# Altium PCB EV306V1.1.PcbDoc (part 2 of 2)
Units mil, origin at the board's own origin, x right, y up, seen from the top; angles counter-clockwise.
Board outline 2423.31 x 1575 mil, 2 copper layers (Top Layer, Bottom Layer); 70 components, 60 nets, 272 pads, 204 vias.
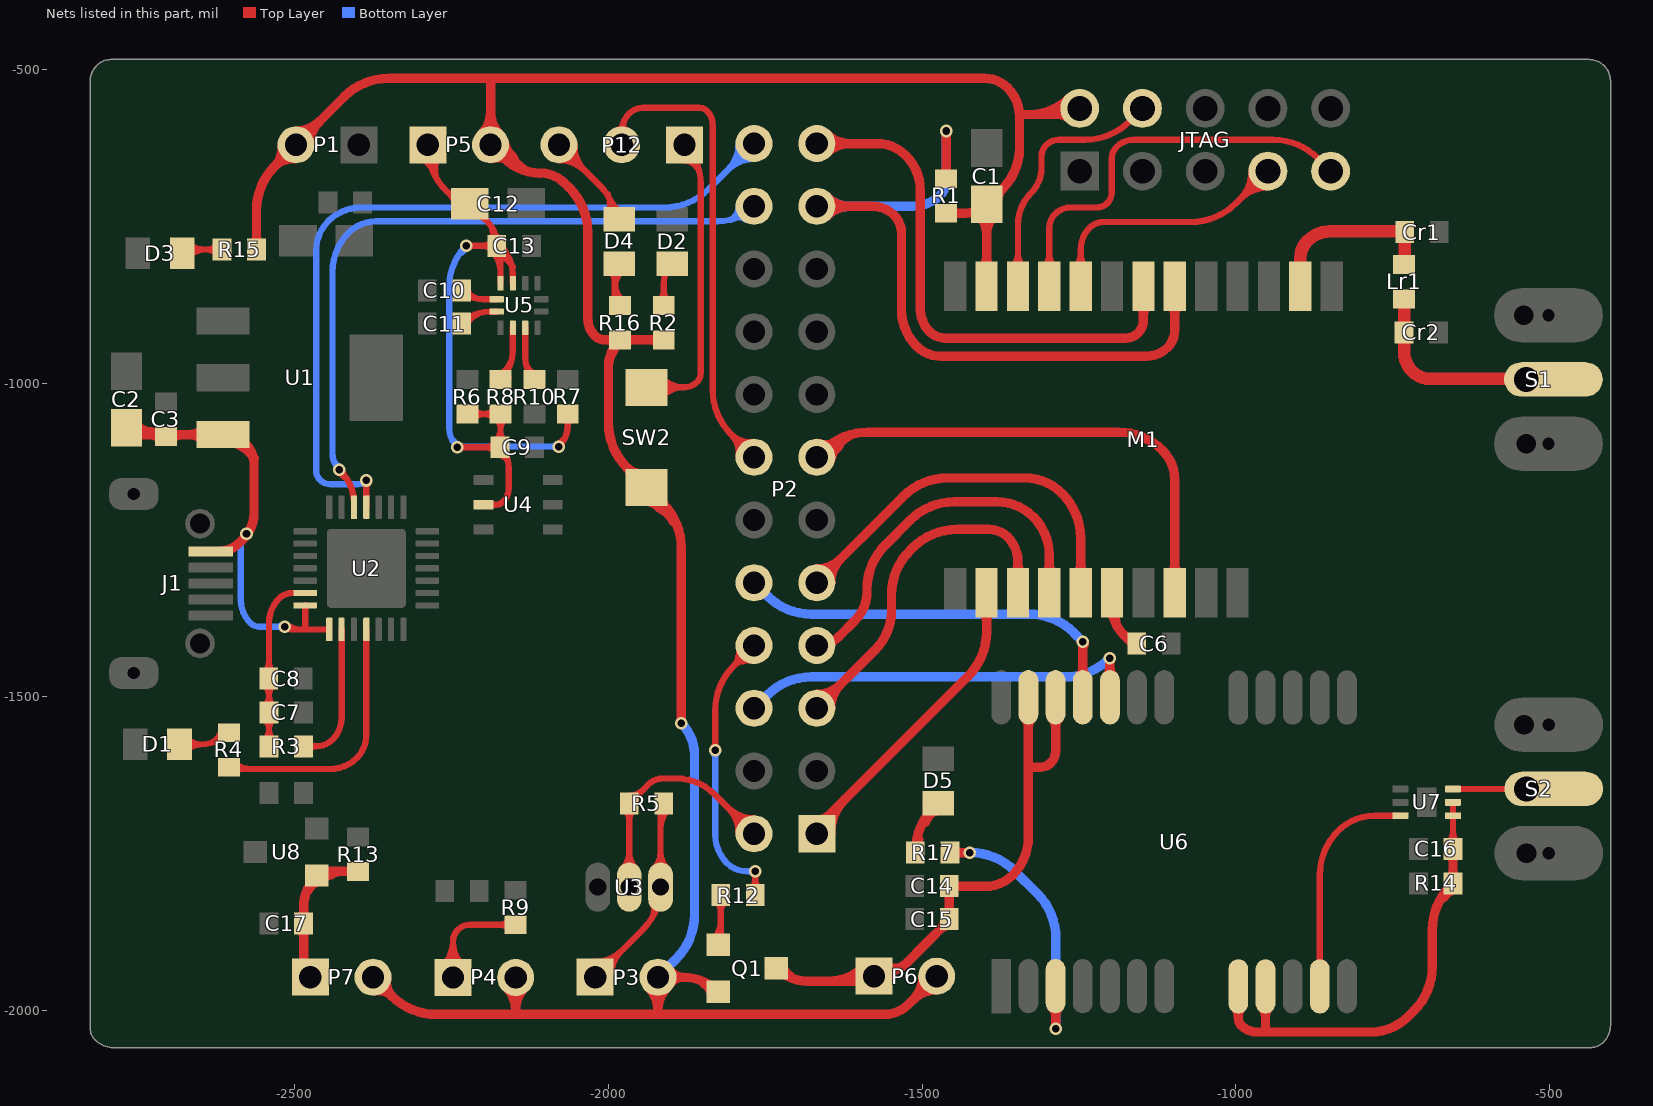
[diagram p2: the nets of this part, all layers, seen from the top]

## Via types
v1: diameter 20, hole 12, Top Layer to Bottom Layer, tented both sides, 191 vias
v2: diameter 19.68, hole 7.87, Top Layer to Bottom Layer, tented both sides, 9 vias
v3: diameter 129.92, hole 129.92, Top Layer to Bottom Layer, tented both sides, 4 vias

## Nets (pads, with @x,y where several pads share a name; then routed paths per layer and width w, separated by ;. In a path a pad name is that pad's centre, name@x,y a point inside that pad or via, vN(x,y) a via of type N, cw(c..) or ccw(c..) an arc to the next point about the centre after c; other vN are vias at no path point) (continued)
NetC6_2: C6.2 M1.6 | length 217.4
  Top Layer w15: M1.6@-1198,-1335.07 cw(c-1196.17,-1335.07) M1.6@-1197.46,-1333.78 -1197.46,-1356.42 ccw(c-1134.42,-1356.42) -1179,-1401 ; C6.2@-1158,-1415 cw(c-1158,-1398.1) -1169.94,-1410.06 -1179,-1401 ; -1179,-1401 ccw(c-1166.14,-1388.14) -1160.38,-1405.39 cw(c-1166.14,-1388.14) -1179,-1401 ; M1.6@-1202.57,-1364.28 cw(c-1214.47,-1384.88) -1191.49,-1378.73 ccw(c-1214.47,-1384.88) M1.6@-1202.57,-1364.28 ; -1191.17,-1379.92 cw(c-1166.5,-1373.31) -1188.62,-1360.54 ccw(c-1166.5,-1373.31) -1191.17,-1379.92
NetC7_1: C7.1 C8.1 R3.2 U2.6 | length 663.2
  Top Layer w10: R3.2@-2541.31,-1578.69 -2541,-1578.39 -2541,-1381.63 cw(c-2486.37,-1381.63) -2525,-1343 cw(c-2504.17,-1363.83) -2504.17,-1334.37 U2.6@-2483.44,-1334.37 ; C8.1@-2548.5,-1480.26 cw(c-2566.59,-1498.36) -2541,-1498.36 ccw(c-2566.59,-1498.36) C8.1@-2548.5,-1480.26 ; C8.1@-2548.5,-1461.12 ccw(c-2566.59,-1443.02) -2541,-1443.02 cw(c-2566.59,-1443.02) C8.1@-2548.5,-1461.12 ; R3.2@-2548.38,-1569.12 ccw(c-2566.19,-1551.31) -2541,-1551.31 cw(c-2566.19,-1551.31) R3.2@-2548.38,-1569.12 ; C7.1@-2548.38,-1534.26 cw(c-2566.19,-1552.08) -2541,-1552.08 ccw(c-2566.19,-1552.08) C7.1@-2548.38,-1534.26 ; C7.1@-2548.38,-1515.12 ccw(c-2566.19,-1497.31) -2541,-1497.31 cw(c-2566.19,-1497.31) C7.1@-2548.38,-1515.12 ; -2541,-1552.79 ccw(c-2517.91,-1552.79) -2534.24,-1569.12 cw(c-2517.91,-1552.79) -2541,-1552.79 ; -2541,-1550.59 cw(c-2517.91,-1550.59) -2534.24,-1534.26 ccw(c-2517.91,-1550.59) -2541,-1550.59 ; -2541,-1498.79 ccw(c-2517.91,-1498.79) -2534.24,-1515.12 cw(c-2517.91,-1498.79) -2541,-1498.79 ; -2541,-1496.31 cw(c-2518.31,-1496.31) -2534.35,-1480.26 ccw(c-2518.31,-1496.31) -2541,-1496.31 ; -2541,-1445.08 ccw(c-2518.31,-1445.08) -2534.35,-1461.12 cw(c-2518.31,-1445.08) -2541,-1445.08
NetC10_1: C10.1 U5.11 | length 119.7
  Top Layer w10: C10.1@-2234,-852 ccw(c-2199.79,-817.79) -2199.79,-866.17 U5.11@-2178.03,-866.17 ; C10.1@-2229.51,-863.43 cw(c-2221.88,-878.6) -2213.39,-863.9 ccw(c-2221.88,-878.6) C10.1@-2229.51,-863.43 ; C10.1@-2224.34,-851.91 ccw(c-2208.16,-847.58) -2216.54,-862.08 cw(c-2208.16,-847.58) C10.1@-2224.34,-851.91
NetC11_2: C11.2 U5.12 | length 100
  Top Layer w10: C11.2@-2235,-905 cw(c-2188.79,-951.21) -2188.79,-885.86 U5.12@-2178.03,-885.86 ; C11.2@-2231.41,-892.84 ccw(c-2223.69,-864.03) -2208.78,-889.86 ; C11.2@-2224.34,-905.09 cw(c-2206.51,-909.87) -2215.74,-893.88
NetC16_2: C16.2 R14.1 U6.8 U6.9 U7.1 U7.2 | length 1047.4
  Top Layer w10: U7.2@-654.07,-1668 U7.1@-654.07,-1689.26 -654.07,-1741.93 C16.2@-654,-1742 ; C16.2@-661.07,-1732.43 ccw(c-677.97,-1715.53) -654.07,-1715.53 cw(c-677.97,-1715.53) C16.2@-661.07,-1732.43 ; -654.07,-1715.19 ccw(c-629.69,-1715.19) -646.93,-1732.43 cw(c-629.69,-1715.19) -654.07,-1715.19
  Top Layer w15: U6.8@-1002.03,-1994.69 cw(c-1016.12,-2008.77) -996.2,-2008.77 cw(c-976.28,-2008.77) U6.8@-990.37,-1994.69 ; U6.8@-996.2,-1961.3 -996.2,-2011.45 ccw(c-978.45,-2011.45) -991,-2024 ccw(c-966.86,-1999.86) -966.86,-2034 -953,-2034 ; U6.9@-958.73,-1994.69 cw(c-972.82,-2008.77) -952.9,-2008.77 cw(c-932.98,-2008.77) U6.9@-947.07,-1994.69 ; U6.9@-952.9,-1961.3 -952.9,-2033.9 -953,-2034 ; -668.46,-1819.33 cw(c-645.07,-1832.84) R14.1@-652.06,-1806.74 ; C16.2@-654,-1742 R14.1@-654,-1797 -657.71,-1800.71 ccw(c-587,-1871.42) -687,-1871.42 -687,-1929.58 cw(c-787,-1929.58) -716.29,-2000.29 -725,-2009 cw(c-785.36,-1948.64) -785.36,-2034 -953,-2034 ; -654,-1776.39 cw(c-672.11,-1776.39) -659.3,-1789.2 ccw(c-672.11,-1776.39) -654,-1776.39 ; -654,-1776.39 ccw(c-635.89,-1776.39) -648.7,-1789.2 cw(c-635.89,-1776.39) -654,-1776.39 ; -654,-1762.61 cw(c-635.89,-1762.61) -648.7,-1749.8 ccw(c-635.89,-1762.61) -654,-1762.61 ; -654,-1762.61 ccw(c-672.11,-1762.61) -659.3,-1749.8 cw(c-672.11,-1762.61) -654,-1762.61
NetCr1_2: Cr1.2 Lr1.1 M1.12 | length 345.7
  Top Layer w20: M1.12@-897.46,-845.59 -897.46,-800.68 cw(c-858.32,-800.68) -886,-773 cw(c-849.79,-809.21) -849.79,-758 -733.41,-758 cw(c-733.41,-761.41) Cr1.2@-731,-759 -731,-808.59 cw(c-734.41,-808.59) Lr1.1@-732,-811 ; -897.46,-805.31 cw(c-916.09,-805.31) -902.92,-818.48 ccw(c-916.09,-805.31) -897.46,-805.31 ; -897.46,-805.31 ccw(c-878.84,-805.31) -892.01,-818.48 cw(c-878.84,-805.31) -897.46,-805.31
NetCr2_2: Cr2.2 Lr1.2 S1.1 | length 346.9
  Top Layer w20: Lr1.2@-732,-866 Cr2.2@-732,-919 -732,-949.62 ccw(c-687.62,-949.62) -719,-981 ccw(c-690.03,-952.03) -690.03,-993 -537.31,-993 ccw(c-534.89,-990.59) -534.89,-994 S1.1@-494,-994
NetD1_1: D1.1 R4.2 | length 224.2
  Top Layer w10: D1.1@-2683.62,-1575.63 -2649.98,-1575.63 ; -2630.4,-1571.66 ccw(c-2644.6,-1547.06) R4.2@-2617.16,-1554.41 ; -2625.17,-1568.64 cw(c-2615.23,-1585.86) R4.2@-2610.09,-1566.66 ; R4.2@-2605,-1557 cw(c-2649.98,-1512.02) -2649.98,-1575.63 ; -2649.98,-1575.63 cw(c-2649.98,-1544.43) -2672.85,-1565.64 ccw(c-2649.98,-1544.43) -2649.98,-1575.63 ; -2649.98,-1575.63 ccw(c-2649.98,-1606.83) -2672.85,-1585.61 cw(c-2649.98,-1606.83) -2649.98,-1575.63
NetD2_1: D2.1 R2.1 | length 159.3
  Top Layer w10: R2.1@-1912,-876 -1912,-841.66 cw(c-1866.35,-841.66) D2.1@-1898.63,-809.38 D2.1@-1889.29,-818.72 ; -1912,-851.86 cw(c-1936.14,-851.86) -1919.07,-868.93 ccw(c-1936.14,-851.86) -1912,-851.86 ; -1912,-851.86 ccw(c-1887.86,-851.86) -1904.93,-868.93 cw(c-1887.86,-851.86) -1912,-851.86
NetD3_1: D3.1 R15.1 | length 252.3
  Top Layer w10: D3.1@-2679.62,-792.63 cw(c-2666.03,-806.22) -2666.03,-787 R15.1@-2616,-787 ; -2640.14,-787 cw(c-2640.14,-811.14) -2623.07,-794.07 ccw(c-2640.14,-811.14) -2640.14,-787 ; -2640.14,-787 ccw(c-2640.14,-762.86) -2623.07,-779.93 cw(c-2640.14,-762.86) -2640.14,-787 ; D3.1@-2669.24,-797.7 cw(c-2643.41,-823.53) -2643.41,-787 ccw(c-2643.41,-823.53) D3.1@-2669.24,-797.7 ; D3.1@-2669.24,-776.93 ccw(c-2644.93,-752.62) -2644.93,-787 cw(c-2644.93,-752.62) D3.1@-2669.24,-776.93
NetD4_1: D4.1 R16.1 | length 247
  Top Layer w10: D4.1@-1990.63,-809.38 -1992.71,-811.46 cw(c-1999.25,-818) -1990,-818 R16.1@-1990,-876 ; D4.1@-1998.33,-819.76 cw(c-2018.44,-839.87) -1990,-839.87 ccw(c-2018.44,-839.87) D4.1@-1998.33,-819.76 ; -1990,-849.79 cw(c-1947.53,-849.79) -1977.56,-819.76 ccw(c-1947.53,-849.79) -1990,-849.79 ; -1990,-838.58 ccw(c-1947.08,-838.58) -1977.43,-868.93 cw(c-1947.08,-838.58) -1990,-838.58
NetD4_2: D4.2 P12.3 | length 411.5
  Top Layer w10: P12.3@-2079,-644.53 cw(c-2079,-703.74) -2037.13,-661.87 cw(c-1995.26,-620) P12.3@-2054.47,-620 ; P12.3@-2079,-634.53 cw(c-2079,-669.6) -2054.2,-644.8 cw(c-2029.4,-620) P12.3@-2064.47,-620 ; P12.3@-2079,-620 -2011.94,-687.06 cw(c-2063.4,-738.51) D4.2@-1990.63,-738.51 ; -2001.25,-698.89 ccw(c-1958.45,-687.42) -1980.6,-725.79 cw(c-1958.45,-687.42) -2001.25,-698.89 ; D4.2@-2000.66,-731.17 ccw(c-2023.7,-717.87) -1998.01,-710.99 cw(c-2023.7,-717.87) D4.2@-2000.66,-731.17
NetD5_1: D5.1 R17.1 | length 192.5
  Top Layer w15: R17.1@-1511,-1748 -1511,-1747.17 cw(c-1411,-1747.17) -1481.71,-1676.46 D5.1@-1474.63,-1669.38 ; -1495.34,-1700.06 ccw(c-1526.76,-1681.92) D5.1@-1491.71,-1672.53 ; -1490.48,-1691.65 cw(c-1470.95,-1702.93) D5.1@-1476.79,-1681.15 ; R17.1@-1514.75,-1739 ccw(c-1524.54,-1722.05) -1505.63,-1727.11 cw(c-1524.54,-1722.05) R17.1@-1514.75,-1739 ; -1506.17,-1729.13 ccw(c-1490.1,-1733.43) -1504.5,-1741.75 cw(c-1490.1,-1733.43) -1506.17,-1729.13
NetP12_1: P12.1 SW2.1 | length 693.6
  Top Layer w10: SW2.1@-1939.18,-1006.48 -1879.47,-1006.48 ccw(c-1879.47,-977.53) -1859,-998 ccw(c-1873.49,-983.51) -1853,-983.51 -1853,-682.77 ccw(c-1941.77,-682.77) P12.1@-1879,-620 P12.1@-1858.29,-640.71 ; SW2.1@-1924.54,-1016.3 cw(c-1902.21,-1036.77) -1902.21,-1006.48 cw(c-1902.21,-976.19) SW2.1@-1924.54,-996.66 ; SW2.1@-1917.17,-1023.06 cw(c-1879.48,-1057.62) -1879.48,-1006.48 cw(c-1879.48,-955.34) SW2.1@-1917.17,-989.9 ; P12.1@-1880.63,-644.47 cw(c-1882.68,-675.18) -1856.03,-659.79 cw(c-1829.37,-644.41) P12.1@-1856.99,-630.82
NetQ1_1: Q1.1 R12.1 | length 252.5
  Top Layer w10: Q1.1@-1824.96,-1895.11 ccw(c-1834.51,-1885.55) -1821,-1885.55 R12.1@-1821,-1816 ; -1821,-1842.64 cw(c-1796.86,-1842.64) -1813.93,-1825.57 ccw(c-1796.86,-1842.64) -1821,-1842.64 ; -1821,-1842.64 ccw(c-1845.14,-1842.64) -1828.07,-1825.57 cw(c-1845.14,-1842.64) -1821,-1842.64 ; Q1.1@-1832.96,-1886.11 ccw(c-1861.85,-1857.23) -1821,-1857.23 cw(c-1861.85,-1857.23) Q1.1@-1832.96,-1886.11 ; -1821,-1871.58 ccw(c-1800.45,-1871.58) -1814.98,-1886.11 cw(c-1800.45,-1871.58) -1821,-1871.58
NetR3_1: R3.1 U2.9 | length 286.7
  Top Layer w10: R3.1@-2486.31,-1578.69 -2465.81,-1578.69 ; U2.9@-2425.37,-1392.44 -2425.37,-1532.68 cw(c-2475.32,-1532.68) -2440,-1568 cw(c-2465.81,-1542.19) -2465.81,-1578.69 ; -2465.82,-1578.69 cw(c-2465.82,-1562.7) -2478.42,-1572.54 ccw(c-2465.82,-1562.7) -2465.82,-1578.69 ; -2465.82,-1578.69 ccw(c-2465.82,-1594.69) -2478.42,-1584.85 cw(c-2465.82,-1594.69) -2465.82,-1578.69
NetR4_1: R4.1 U2.11 | length 494
  Top Layer w10: R4.1@-2605,-1612 ccw(c-2597.76,-1604.76) -2597.76,-1615 -2444.46,-1615 ccw(c-2444.46,-1553.54) -2401,-1597 ccw(c-2437.21,-1560.79) -2386,-1560.79 U2.11@-2386,-1392.44 ; R4.1@-2595.43,-1619.07 cw(c-2585.6,-1628.9) -2585.6,-1615 ccw(c-2585.6,-1628.9) R4.1@-2595.43,-1619.07 ; R4.1@-2595.43,-1604.93 ccw(c-2571.12,-1580.62) -2571.12,-1615 cw(c-2571.12,-1580.62) R4.1@-2595.43,-1604.93
NetR8_1: R8.1 U5.2 | length 125.7
  Top Layer w10: R8.1@-2172.09,-984.34 ccw(c-2176.42,-968.16) -2161.92,-976.54 ; R8.1@-2172,-994 ccw(c-2219.22,-946.78) -2152.44,-946.78 U5.2@-2152.44,-911.45 ; R8.1@-2159.84,-991.41 cw(c-2129.38,-983.25) -2156.69,-967.48
NetR10_1: R10.1 U5.3 | length 148.9
  Top Layer w10: U5.3@-2132.76,-911.45 -2132.76,-958.37 ccw(c-2082.37,-958.37) R10.1@-2118,-994 ; -2130.41,-972.5 cw(c-2146.81,-981.96) -2129.59,-989.84 ccw(c-2146.81,-981.96) -2130.41,-972.5 ; -2128.08,-976.54 ccw(c-2113.58,-968.16) -2117.91,-984.34 cw(c-2113.58,-968.16) -2128.08,-976.54
NetR17_2: R17.2 U6.3 | length 542.1
  Top Layer w15: R17.2@-1456,-1748 v1(-1424,-1748) ; U6.3@-1293.33,-1994.29 cw(c-1308.62,-2009.58) -1287,-2009.58 ; U6.3@-1287.5,-1960.9 cw(c-1288.71,-1962.11) -1287,-1962.11 v1(-1287,-2029) ; -1287,-2007.17 cw(c-1268.79,-2007.17) U6.3@-1281.67,-1994.29 ; -1437.89,-1748 cw(c-1437.89,-1729.89) -1450.7,-1742.7 ccw(c-1437.89,-1729.89) -1437.89,-1748 ; -1437.89,-1748 ccw(c-1437.89,-1766.11) -1450.7,-1753.3 cw(c-1437.89,-1766.11) -1437.89,-1748
  Bottom Layer w15: v1(-1424,-1748) -1423.42,-1748 cw(c-1423.42,-1848) -1352.71,-1777.29 -1316.29,-1813.71 cw(c-1387,-1884.42) -1287,-1884.42 v1(-1287,-2029)
NetS2_1: S2.1 U7.3 | length 160.5
  Top Layer w10: U7.3@-654.07,-1646.74 -493.7,-1646.74 S2.1@-493.58,-1646.62
NetU6_11: U6.11 U7.6 | length 361.2
  Top Layer w10: U6.11@-866.3,-1961.3 -866.3,-1784.15 cw(c-766.3,-1784.15) -837.01,-1713.44 cw(c-778.64,-1771.81) -825.14,-1703.6 cw(c-778.64,-1771.81) -778.64,-1689.26 U7.6@-737.93,-1689.26
PWR_CNTR1: M1.4 P2.7 | length 679.9
  Top Layer w15: P2.7@-1668,-1418 ccw(c-1668,-1367.3) -1632.15,-1403.15 -1607.09,-1378.09 ccw(c-1653.18,-1332) -1588,-1332 -1588,-1328.42 cw(c-1488,-1328.42) -1558.71,-1257.71 -1519.29,-1218.29 cw(c-1448.58,-1289) -1448.58,-1189 -1380.94,-1189 cw(c-1380.94,-1270.94) -1323,-1213 cw(c-1384.65,-1274.65) -1297.46,-1274.65 M1.4@-1297.46,-1333.78 ; -1297.46,-1287.46 cw(c-1322.13,-1287.46) -1304.69,-1304.9 ccw(c-1322.13,-1287.46) -1297.46,-1287.46 ; -1297.46,-1287.46 ccw(c-1272.8,-1287.46) -1290.24,-1304.9 cw(c-1272.8,-1287.46) -1297.46,-1287.46
PWR_CNTR2: P2.8 R12.2 | length 883.5
  Top Layer w10: v1(-1830,-1585) -1830,-1521.42 cw(c-1730,-1521.42) -1800.71,-1450.71 ; -1793.06,-1436.08 cw(c-1749.64,-1439.22) P2.8@-1778.12,-1406.3 ; -1786.08,-1443.06 ccw(c-1789.22,-1399.64) P2.8@-1756.3,-1428.12 ; R12.2@-1768,-1811.17 ccw(c-1761.17,-1811.17) R12.2@-1766,-1816 v1(-1766,-1778) ; P2.8@-1768,-1418 -1800.71,-1450.71 ; -1830,-1572.93 cw(c-1842.07,-1572.93) -1833.54,-1581.46 ccw(c-1842.07,-1572.93) -1830,-1572.93 ; -1830,-1572.93 ccw(c-1817.93,-1572.93) -1826.46,-1581.46 cw(c-1817.93,-1572.93) -1830,-1572.93 ; -1800.71,-1450.71 cw(c-1778.54,-1472.88) -1772.62,-1442.09 ccw(c-1778.54,-1472.88) -1800.71,-1450.71 ; -1800.71,-1450.71 ccw(c-1822.88,-1428.54) -1792.09,-1422.62 cw(c-1822.88,-1428.54) -1800.71,-1450.71 ; -1766,-1790.07 cw(c-1753.93,-1790.07) -1762.46,-1781.54 ccw(c-1753.93,-1790.07) -1766,-1790.07 ; -1766,-1790.07 ccw(c-1778.07,-1790.07) -1769.54,-1781.54 cw(c-1778.07,-1790.07) -1766,-1790.07 ; -1766,-1789.36 cw(c-1790.14,-1789.36) -1773.07,-1806.43 ccw(c-1790.14,-1789.36) -1766,-1789.36 ; -1766,-1789.36 ccw(c-1741.86,-1789.36) -1758.93,-1806.43 cw(c-1741.86,-1789.36) -1766,-1789.36
  Bottom Layer w10: v1(-1830,-1585) -1830,-1719.13 ccw(c-1765.13,-1719.13) -1811,-1765 ccw(c-1779.62,-1733.62) -1779.62,-1778 v1(-1766,-1778) ; -1830,-1597.07 cw(c-1817.93,-1597.07) -1826.46,-1588.54 ccw(c-1817.93,-1597.07) -1830,-1597.07 ; -1830,-1597.07 ccw(c-1842.07,-1597.07) -1833.54,-1588.54 cw(c-1842.07,-1597.07) -1830,-1597.07 ; -1778.07,-1778 cw(c-1778.07,-1790.07) -1769.54,-1781.54 ccw(c-1778.07,-1790.07) -1778.07,-1778 ; -1778.07,-1778 ccw(c-1778.07,-1765.93) -1769.54,-1774.46 cw(c-1778.07,-1765.93) -1778.07,-1778
RESET1: JTAG.4 M1.21 | length 505.7
  Top Layer w10: M1.21@-1347.46,-845.59 -1347.46,-747.82 cw(c-1274.18,-747.82) -1326,-696 ccw(c-1364.63,-657.37) -1310,-657.37 -1310,-639.31 cw(c-1282.69,-639.31) -1302,-620 cw(c-1282.69,-639.31) -1282.69,-612 -1240.42,-612 ccw(c-1240.42,-512) -1169.71,-582.71 JTAG.4@-1149,-562 ; -1347.46,-793.24 cw(c-1378.16,-793.24) -1356.46,-814.95 ccw(c-1378.16,-793.24) -1347.46,-793.24 ; -1347.46,-793.24 ccw(c-1316.76,-793.24) -1338.47,-814.95 cw(c-1316.76,-793.24) -1347.46,-793.24
SWCLK1: JTAG.9 M1.20 | length 756.5
  Top Layer w10: M1.20@-1297.46,-845.59 -1297.46,-752.85 cw(c-1265.15,-752.85) -1288,-730 cw(c-1263.86,-754.14) -1263.86,-720 -1221.9,-720 ccw(c-1221.9,-696.1) -1205,-713 ccw(c-1221.9,-696.1) -1198,-696.1 -1198,-642.31 cw(c-1170.69,-642.31) -1190,-623 cw(c-1163.44,-649.56) -1163.44,-612 -940.42,-612 cw(c-940.42,-712) -869.71,-641.29 JTAG.9@-849,-662 ; -1297.46,-793.24 cw(c-1328.16,-793.24) -1306.46,-814.95 ccw(c-1328.16,-793.24) -1297.46,-793.24 ; -1297.46,-793.24 ccw(c-1266.76,-793.24) -1288.47,-814.95 cw(c-1266.76,-793.24) -1297.46,-793.24
SWDIO1: JTAG.7 M1.19 | length 668.8
  Top Layer w10: M1.19@-1247.46,-845.59 -1247.46,-786.92 cw(c-1198.08,-786.92) -1233,-752 cw(c-1211.27,-773.73) -1211.27,-743 -1071.42,-743 ccw(c-1071.42,-643) -1000.71,-713.71 JTAG.7@-949,-662 ; JTAG.7@-975,-662 cw(c-1037.77,-662) -993.38,-706.38 cw(c-949,-750.77) JTAG.7@-949,-688 ; JTAG.7@-965,-662 cw(c-1003.63,-662) -976.31,-689.31 cw(c-949,-716.63) JTAG.7@-949,-678 ; -1247.46,-793.24 cw(c-1278.16,-793.24) -1256.46,-814.95 ccw(c-1278.16,-793.24) -1247.46,-793.24 ; -1247.46,-793.24 ccw(c-1216.76,-793.24) -1238.47,-814.95 cw(c-1216.76,-793.24) -1247.46,-793.24
UART1_RX1: M1.16 P2.21 R1.1 | length 1537.5
  Top Layer w15: P2.21@-1668,-718 -1578.8,-718 cw(c-1578.8,-765.8) -1545,-732 cw(c-1573.97,-760.97) -1533,-760.97 -1533,-883.06 ccw(c-1451.06,-883.06) -1509,-941 ccw(c-1470.37,-902.37) -1470.37,-957 -1142.8,-957 ccw(c-1142.8,-909.2) -1109,-943 ccw(c-1136.85,-915.15) -1097.46,-915.15 M1.16@-1097.46,-845.59 ; P2.21@-1652.42,-733.58 cw(c-1614.82,-771.18) -1614.82,-718 cw(c-1614.82,-664.82) P2.21@-1652.42,-702.42 ; R1.1@-1462,-674 v1(-1462,-598) ; -1462,-655.89 cw(c-1480.11,-655.89) -1467.3,-668.7 ccw(c-1480.11,-655.89) -1462,-655.89 ; -1462,-655.89 ccw(c-1443.89,-655.89) -1456.7,-668.7 cw(c-1443.89,-655.89) -1462,-655.89 ; -1097.46,-891.91 cw(c-1072.8,-891.91) -1090.24,-874.47 ccw(c-1072.8,-891.91) -1097.46,-891.91 ; -1097.46,-891.91 ccw(c-1122.13,-891.91) -1104.69,-874.47 cw(c-1122.13,-891.91) -1097.46,-891.91
  Bottom Layer w15: P2.21@-1668,-718 -1514.46,-718 ccw(c-1514.46,-656.54) -1471,-700 ccw(c-1492.73,-678.27) -1462,-678.27 v1(-1462,-598) ; P2.21@-1652.42,-733.58 cw(c-1614.82,-771.18) -1614.82,-718 cw(c-1614.82,-664.82) P2.21@-1652.42,-702.42
UART1_RX2: P2.22 U2.26 | length 1280.2
  Top Layer w10: v1(-2429,-1138) -2427,-1140 cw(c-2478.46,-1191.46) -2405.68,-1191.46 U2.26@-2405.68,-1197.56 ; v1@-2424.31,-1139.75 ccw(c-2417.95,-1142.12) -2421.35,-1147.99 ; v1@-2430.29,-1142.83 cw(c-2434.07,-1156.9) -2421.45,-1149.62 ccw(c-2434.07,-1156.9) v1@-2430.29,-1142.83 ; v1@-2424.17,-1139.29 ccw(c-2414.92,-1141.77) -2423.21,-1146.56 cw(c-2414.92,-1141.77) v1@-2424.17,-1139.29
  Bottom Layer w10: v1@-2433.83,-1136.71 ccw(c-2445.49,-1133.58) -2435.04,-1127.55 ccw(c-2424.58,-1121.51) v1@-2427.71,-1133.17 ; v1(-2429,-1138) cw(c-2402.44,-1111.44) -2440,-1111.44 -2440,-822.77 cw(c-2351.23,-822.77) -2414,-760 cw(c-2370.54,-803.46) -2370.54,-742 -1825.94,-742 ccw(c-1825.94,-660.06) P2.22@-1768,-718 ; -1804.78,-739.22 cw(c-1792.54,-760.44) -1780.28,-739.23 ccw(c-1792.54,-760.44) -1804.78,-739.22 ; -1804.78,-739.22 ccw(c-1817.01,-718.02) -1792.53,-718.01 cw(c-1817.01,-718.02) -1804.78,-739.22
UART1_TX1: M1.17 P2.23 | length 1012.8
  Top Layer w15: P2.23@-1668,-618 -1571.87,-618 cw(c-1571.87,-682.87) -1526,-637 cw(c-1581.53,-692.53) -1503,-692.53 -1503,-881.79 ccw(c-1451.79,-881.79) -1488,-918 ccw(c-1463.86,-893.86) -1463.86,-928 -1175.31,-928 ccw(c-1175.31,-900.69) -1156,-920 ccw(c-1176.61,-899.39) -1147.46,-899.39 M1.17@-1147.46,-845.59 ; P2.23@-1652.42,-633.58 cw(c-1614.82,-671.18) -1614.82,-618 cw(c-1614.82,-564.82) P2.23@-1652.42,-602.42 ; -1147.46,-891.91 cw(c-1122.8,-891.91) -1140.24,-874.47 ccw(c-1122.8,-891.91) -1147.46,-891.91 ; -1147.46,-891.91 ccw(c-1172.13,-891.91) -1154.69,-874.47 cw(c-1172.13,-891.91) -1147.46,-891.91
UART1_TX2: P2.24 U2.25 | length 1428.6
  Top Layer w10: v1@-2389.54,-1158.54 cw(c-2398.07,-1167.07) -2386,-1167.07 cw(c-2373.93,-1167.07) v1@-2382.46,-1158.54 ; U2.25@-2386,-1197.56 v1(-2386,-1155)
  Bottom Layer w10: v1(-2386,-1155) cw(c-2400.49,-1140.51) -2400.49,-1161 -2443.1,-1161 cw(c-2443.1,-1137.1) -2460,-1154 cw(c-2445.51,-1139.51) -2466,-1139.51 -2466,-788.6 cw(c-2399.37,-788.6) -2446.49,-741.49 cw(c-2394.62,-793.36) -2394.62,-720 -1911.42,-720 ccw(c-1911.42,-620) -1840.71,-690.71 P2.24@-1768,-618 ; P2.24@-1792.53,-618 cw(c-1851.74,-618) -1809.87,-659.87 cw(c-1768,-701.74) P2.24@-1768,-642.53 ; P2.24@-1782.53,-618 cw(c-1817.6,-618) -1792.8,-642.8 cw(c-1768,-667.6) P2.24@-1768,-632.53
UART2_RX1: M1.3 P2.5 | length 727.4
  Top Layer w15: P2.5@-1668,-1518 -1575.16,-1425.16 ccw(c-1638.33,-1362) -1549,-1362 -1549,-1337.42 cw(c-1449,-1337.42) -1519.71,-1266.71 -1515.29,-1262.29 cw(c-1444.58,-1333) -1444.58,-1233 -1392.97,-1233 cw(c-1392.97,-1273.97) -1364,-1245 cw(c-1403.92,-1284.92) -1347.46,-1284.92 M1.3@-1347.46,-1333.78 ; P2.5@-1668,-1495.97 ccw(c-1668,-1442.79) -1630.4,-1480.4 ccw(c-1592.79,-1518) P2.5@-1645.97,-1518 ; -1347.46,-1287.46 cw(c-1372.13,-1287.46) -1354.69,-1304.9 ccw(c-1372.13,-1287.46) -1347.46,-1287.46 ; -1347.46,-1287.46 ccw(c-1322.8,-1287.46) -1340.24,-1304.9 cw(c-1322.8,-1287.46) -1347.46,-1287.46
UART2_RX2: P2.6 U6.20 | length 685.5
  Top Layer w15: U6.20@-1206.73,-1467.21 ccw(c-1220.82,-1453.13) -1200.9,-1453.13 ccw(c-1180.98,-1453.13) U6.20@-1195.07,-1467.21 ; v1(-1201,-1438) -1200.9,-1438.1 U6.20@-1200.9,-1500.6
  Bottom Layer w15: P2.6@-1768,-1518 -1747.29,-1497.29 cw(c-1676.58,-1568) -1676.58,-1468 -1272.42,-1468 ccw(c-1272.42,-1368) -1201.71,-1438.71 v1(-1201,-1438)
UART2_TX1: M1.5 P2.9 | length 789.4
  Top Layer w15: P2.9@-1668,-1318 -1530.29,-1180.29 cw(c-1459.58,-1251) -1459.58,-1151 -1335.94,-1151 cw(c-1335.94,-1232.94) -1278,-1175 -1276.75,-1176.25 cw(c-1347.46,-1246.96) -1247.46,-1246.96 M1.5@-1247.46,-1333.78 ; P2.9@-1668,-1295.97 ccw(c-1668,-1242.79) -1630.4,-1280.4 ccw(c-1592.79,-1318) P2.9@-1645.97,-1318 ; -1247.46,-1287.46 cw(c-1272.13,-1287.46) -1254.69,-1304.9 ccw(c-1272.13,-1287.46) -1247.46,-1287.46 ; -1247.46,-1287.46 ccw(c-1222.8,-1287.46) -1240.24,-1304.9 cw(c-1222.8,-1287.46) -1247.46,-1287.46
UART2_TX2: P2.10 U6.21 | length 675.3
  Top Layer w15: U6.21@-1250.03,-1467.21 ccw(c-1264.12,-1453.13) -1244.2,-1453.13 ccw(c-1224.28,-1453.13) U6.21@-1238.37,-1467.21 ; U6.21@-1244.2,-1500.6 -1244.2,-1422.31 cw(c-1236.69,-1422.31) -1242,-1417 ccw(c-1249.24,-1417) v1(-1244.12,-1411.88)
  Bottom Layer w15: P2.10@-1768,-1318 -1747.29,-1338.71 ccw(c-1676.58,-1268) -1676.58,-1368 -1329.42,-1368 cw(c-1329.42,-1468) -1258.71,-1397.29 v1(-1244.12,-1411.88)
UNIBUS1: M1.2 P2.1 | length 684.2
  Top Layer w15: P2.1@-1668,-1718 cw(c-1643.86,-1718) -1660.93,-1700.93 -1426.75,-1466.75 ccw(c-1497.46,-1396.04) -1397.46,-1396.04 M1.2@-1397.46,-1333.78 ; P2.1@-1668,-1695.97 ccw(c-1668,-1666.94) -1647.47,-1687.47 ; P2.1@-1660.97,-1718 cw(c-1619.86,-1718) P2.1@-1648.93,-1688.93 ; P2.1@-1645.97,-1718 cw(c-1568.65,-1718) -1623.33,-1663.33 ; -1397.46,-1380.1 cw(c-1372.8,-1380.1) -1390.24,-1362.66 ccw(c-1372.8,-1380.1) -1397.46,-1380.1 ; -1397.46,-1380.1 ccw(c-1422.13,-1380.1) -1404.69,-1362.66 cw(c-1422.13,-1380.1) -1397.46,-1380.1
UNIBUS2: P2.2 R5.2 U3.2 | length 697.4
  Top Layer w10: U3.2@-1977.38,-1772.93 ccw(c-2002.45,-1747.86) -1967,-1747.86 ccw(c-1931.55,-1747.86) U3.2@-1956.62,-1772.93 ; U3.2@-1967,-1803 R5.2@-1967,-1670 -1936.9,-1639.9 cw(c-1913,-1663.8) -1913,-1630 -1892,-1630 cw(c-1892,-1716.91) -1830.54,-1655.46 P2.2@-1768,-1718 ; R5.2@-1967,-1657.5 ccw(c-1967,-1627.32) -1945.66,-1648.66 ; R5.2@-1957,-1667.5 cw(c-1938.89,-1667.5) -1951.7,-1654.7 ; P2.2@-1792.53,-1718 ccw(c-1851.74,-1718) -1809.87,-1676.13 ccw(c-1768,-1634.26) P2.2@-1768,-1693.47 ; P2.2@-1782.53,-1718 ccw(c-1817.6,-1718) -1792.8,-1693.2 ccw(c-1768,-1668.4) P2.2@-1768,-1703.47 ; -1967,-1696.64 cw(c-1942.86,-1696.64) -1959.93,-1679.57 ccw(c-1942.86,-1696.64) -1967,-1696.64 ; -1967,-1696.64 ccw(c-1991.14,-1696.64) -1974.07,-1679.57 cw(c-1991.14,-1696.64) -1967,-1696.64
VCC: C1.1 JTAG.2 M1.22 P1.2 P3.2 P4.2 P5.2 P6.2 P7.2 Q1.2 R1.2 R2.2 R15.2 R16.2 SW2.2 | length 7245.8
  Top Layer w15: R15.2@-2561,-787 -2561,-724.42 cw(c-2461,-724.42) -2531.71,-653.71 ; -2523.51,-641.15 cw(c-2485.26,-648.17) P1.2@-2501.28,-612.74 ; -2519.15,-645.51 ccw(c-2526.17,-607.26) P1.2@-2490.74,-623.28 ; P1.2@-2498,-597.97 ccw(c-2498,-544.79) -2460.4,-582.4 ccw(c-2422.79,-620) P1.2@-2475.97,-620 ; P7.2@-2375.31,-1946.69 -2345.29,-1976.71 ; P7.2@-2371.54,-1968.4 cw(c-2366.43,-1997.84) -2345.29,-1976.71 ; P7.2@-2353.6,-1950.46 ccw(c-2324.16,-1955.57) -2345.29,-1976.71 ; P5.2@-2203.58,-604.42 ccw(c-2241.18,-566.82) -2188,-566.82 ccw(c-2134.82,-566.82) P5.2@-2172.42,-604.42 ; P5.2@-2186.48,-626.86 cw(c-2179.24,-659.53) -2150.27,-642.8 ; P4.2@-2148,-1947 -2148,-1998.76 ; -1991.74,-947.78 cw(c-1982.32,-947.78) R16.2@-1983.53,-938.44 ; SW2.2@-1964.25,-1159.71 ccw(c-1988.81,-1152.49) -1970.71,-1134.39 ; SW2.2@-1944.82,-1143.96 cw(c-1947.37,-1111.06) -1970.71,-1134.39 ; SW2.2@-1928.45,-1167.7 ccw(c-1898.48,-1175.56) -1913.73,-1202.53 ; R2.2@-1912,-931 R16.2@-1982,-931 ; v1(-1884,-1541.76) -1884,-1262.52 ccw(c-1984,-1262.52) -1913.29,-1191.81 SW2.2@-1939.18,-1165.92 -1970.71,-1134.39 ; Q1.2@-1824.96,-1969.91 ccw(c-1881.01,-2025.96) -1881.01,-1946.69 ; P6.2@-1499.03,-1945 cw(c-1552.21,-1945) -1514.6,-1982.6 cw(c-1477,-2020.21) P6.2@-1477,-1967.03 ; P6.2@-1477,-1945 -1522.15,-1990.15 cw(c-1560.42,-1951.87) -1560.42,-2006 -1922,-2006 ; R1.2@-1462,-729 -1430.8,-729 ccw(c-1430.8,-681.2) C1.1@-1397,-715 ; M1.22@-1397.46,-845.59 -1397.46,-716.12 cw(c-1395.88,-716.12) C1.1@-1397,-715 ; -1329.03,-571.65 ccw(c-1329.03,-481.97) JTAG.2@-1265.62,-545.38 ; -1292.82,-571.65 ccw(c-1292.82,-518.18) JTAG.2@-1255.01,-555.99 ; -1282.44,-571.65 cw(c-1282.44,-595.44) JTAG.2@-1265.62,-578.62 ; JTAG.2@-1249,-562 cw(c-1272.3,-538.7) -1272.3,-571.65 -1337.23,-571.65 ccw(c-1337.23,-582.64) -1345,-574.87 ; -2561,-766.39 cw(c-2579.11,-766.39) -2566.3,-779.2 ccw(c-2579.11,-766.39) -2561,-766.39 ; -2561,-766.39 ccw(c-2542.89,-766.39) -2555.7,-779.2 cw(c-2542.89,-766.39) -2561,-766.39 ; -2531.71,-653.71 cw(c-2503.02,-682.4) -2499.77,-641.96 ccw(c-2503.02,-682.4) -2531.71,-653.71 ; -2531.71,-653.71 ccw(c-2560.4,-625.02) -2519.96,-621.77 cw(c-2560.4,-625.02) -2531.71,-653.71 ; -2531.71,-653.71 P1.2@-2498,-620 -2421.29,-543.29 cw(c-2350.58,-614) -2350.58,-514 -2190,-514 ; -2345.29,-1976.71 ccw(c-2274.58,-1906) -2274.58,-2006 -2151,-2006 ; -2190,-514 cw(c-2194.83,-518.83) -2188,-518.83 P5.2@-2188,-620 -2167.04,-640.96 ; -2190,-514 -1400.21,-514 cw(c-1400.21,-565.21) -1364,-529 cw(c-1409.87,-574.87) -1345,-574.87 ; -2167.04,-640.96 cw(c-2160.73,-634.65) -2168.59,-630.42 ccw(c-2160.73,-634.65) -2167.04,-640.96 ; -2167.04,-640.96 ccw(c-2173.35,-647.27) -2177.58,-639.41 cw(c-2173.35,-647.27) -2167.04,-640.96 ; -2167.04,-640.96 ccw(c-2109,-582.92) -2109,-665 cw(c-2109,-720.53) -2069.74,-681.26 -2062.29,-688.71 cw(c-2133,-759.42) -2033,-759.42 -2033,-897.44 ccw(c-1995.44,-897.44) -2022,-924 ccw(c-2005.1,-907.1) -2005.1,-931 R16.2@-1982,-931 ; -2163.21,-643.17 cw(c-2157.6,-633.46) -2167.86,-628.91 ccw(c-2157.6,-633.46) -2163.21,-643.17 ; -2163.21,-643.17 ccw(c-2174.81,-663.27) -2181.58,-641.07 cw(c-2174.81,-663.27) -2163.21,-643.17 ; -2151,-2006 ccw(c-2158.24,-1998.76) -2148,-1998.76 ; -2151,-2006 -1922,-2006 ; -2148,-1998.75 cw(c-2098.22,-1998.75) -2132.73,-1962.87 ccw(c-2098.22,-1998.75) -2148,-1998.75 ; -2148,-1998.75 ccw(c-2197.78,-1998.75) -2163.27,-1962.87 cw(c-2197.78,-1998.75) -2148,-1998.75 ; -2002.61,-931 cw(c-2002.61,-949.11) -1989.8,-936.3 ccw(c-2002.61,-949.11) -2002.61,-931 ; -2002.61,-931 ccw(c-2002.61,-912.89) -1989.8,-925.7 cw(c-2002.61,-912.89) -2002.61,-931 ; R16.2@-1982,-931 ccw(c-1938.54,-974.46) -2000,-974.46 -2000,-1063.68 ccw(c-1900,-1063.68) -1970.71,-1134.39 ; -1961.39,-931 cw(c-1961.39,-912.89) -1974.2,-925.7 ccw(c-1961.39,-912.89) -1961.39,-931 ; -1961.39,-931 ccw(c-1961.39,-949.11) -1974.2,-936.3 cw(c-1961.39,-949.11) -1961.39,-931 ; -1932.61,-931 cw(c-1932.61,-949.11) -1919.8,-936.3 ccw(c-1932.61,-949.11) -1932.61,-931 ; -1932.61,-931 ccw(c-1932.61,-912.89) -1919.8,-925.7 cw(c-1932.61,-912.89) -1932.61,-931 ; -1922,-2006 ccw(c-1923.67,-2004.33) -1921.31,-2004.33 P3.2@-1921.31,-1946.69 -1881.01,-1946.69 ; -1921.31,-1999.87 cw(c-1868.13,-1999.87) -1905.73,-1962.27 ccw(c-1868.13,-1999.87) -1921.31,-1999.87 ; -1921.31,-1999.87 ccw(c-1974.49,-1999.87) -1936.88,-1962.27 cw(c-1974.49,-1999.87) -1921.31,-1999.87 ; -1881.01,-1946.69 cw(c-1881.01,-1920.84) -1902.77,-1934.8 ccw(c-1881.01,-1920.84) -1881.01,-1946.69 ; -1881.01,-1946.69 ccw(c-1881.01,-1972.54) -1902.77,-1958.59 cw(c-1881.01,-1972.54) -1881.01,-1946.69 ; -1441.39,-729 cw(c-1441.39,-710.89) -1454.2,-723.7 ccw(c-1441.39,-710.89) -1441.39,-729 ; -1441.39,-729 ccw(c-1441.39,-747.11) -1454.2,-734.3 cw(c-1441.39,-747.11) -1441.39,-729 ; -1397.46,-799.27 cw(c-1422.13,-799.27) -1404.69,-816.71 ccw(c-1422.13,-799.27) -1397.46,-799.27 ; -1397.46,-799.27 ccw(c-1372.8,-799.27) -1390.24,-816.71 cw(c-1372.8,-799.27) -1397.46,-799.27 ; C1.1@-1397,-715 -1371.87,-689.87 ; -1371.87,-689.87 cw(c-1384.15,-677.59) -1390.55,-693.73 ccw(c-1384.15,-677.59) -1371.87,-689.87 ; -1371.87,-689.87 ccw(c-1353.38,-708.36) -1379.51,-709.34 cw(c-1353.38,-708.36) -1371.87,-689.87 ; -1371.87,-689.87 ccw(c-1436.74,-625) -1345,-625 -1345,-574.87 ; P5.2@-2182.3,-641.28 cw(c-2175.31,-667.34) -2161.82,-643.97 ccw(c-2175.31,-667.34) P5.2@-2182.3,-641.28 ; P5.2@-2181.21,-618.18 ccw(c-2139.52,-607.01) -2161.1,-644.39 cw(c-2139.52,-607.01) P5.2@-2181.21,-618.18 ; P5.2@-2166.72,-614.3 ccw(c-2090.06,-593.76) -2129.74,-662.49 cw(c-2090.06,-593.76) P5.2@-2166.72,-614.3 ; -1994.29,-952.29 ccw(c-2016.37,-939.54) -1991.74,-932.94 cw(c-2016.37,-939.54) -1994.29,-952.29 ; SW2.2@-1940.75,-1187.25 cw(c-1958.98,-1257.8) -1896.2,-1220.8 ccw(c-1958.98,-1257.8) SW2.2@-1940.75,-1187.25 ; SW2.2@-1937,-1172.72 cw(c-1946.17,-1208.21) -1914.59,-1189.6 ccw(c-1946.17,-1208.21) SW2.2@-1937,-1172.72 ; SW2.2@-1913.92,-1171.43 ccw(c-1881.49,-1179.81) -1910.34,-1196.81 cw(c-1881.49,-1179.81) SW2.2@-1913.92,-1171.43 ; -1848.08,-1956.56 cw(c-1861.26,-1979.37) -1835.81,-1972.55 ccw(c-1861.26,-1979.37) -1848.08,-1956.56 ; -1846.03,-1957.74 ccw(c-1834.53,-1937.84) -1828.59,-1960.04 cw(c-1834.53,-1937.84) -1846.03,-1957.74 ; C1.1@-1409.37,-732.37 cw(c-1438.13,-761.13) -1397.46,-761.13 ccw(c-1438.13,-761.13) C1.1@-1409.37,-732.37 ; -1397.46,-763.37 cw(c-1353.63,-763.37) -1384.63,-732.37 ccw(c-1353.63,-763.37) -1397.46,-763.37
  Bottom Layer w15: P5.2@-2188,-620 P5.2@-2188,-619 ; P3.2@-1921.31,-1946.69 -1892.29,-1917.68 ccw(c-1963,-1846.96) -1863,-1846.96 -1863,-1592.46 ccw(c-1934.7,-1592.46) v1(-1884,-1541.76)
VCC_18B20: P3.1 R5.1 U3.3 | length 701.1
  Top Layer w10: P3.1@-2021.31,-1946.69 -1944.85,-1870.24 ccw(c-2012.09,-1803) U3.3@-1917,-1803 -1917,-1682.07 cw(c-1899.93,-1682.07) R5.1@-1912,-1670 ; P3.1@-2021.31,-1932.17 ccw(c-2021.31,-1897.09) P3.1@-1996.51,-1921.89 ; P3.1@-2021.31,-1922.17 ccw(c-2021.31,-1862.95) -1979.44,-1904.82 ccw(c-1937.57,-1946.69) P3.1@-1996.78,-1946.69 ; U3.3@-1929.72,-1830.03 cw(c-1945.36,-1839.06) -1927.91,-1843.73 ; -1926.92,-1840.01 cw(c-1908.33,-1844.99) U3.3@-1915.3,-1827.05 ; P3.1@-1996.51,-1921.89 ccw(c-1971.71,-1946.69) -2006.78,-1946.69 cw(c-1971.71,-1946.69) P3.1@-1996.51,-1921.89 ; -1917,-1747.86 cw(c-1952.45,-1747.86) -1927.38,-1772.93 ccw(c-1952.45,-1747.86) -1917,-1747.86 ; -1917,-1747.86 ccw(c-1881.55,-1747.86) -1906.62,-1772.93 cw(c-1881.55,-1747.86) -1917,-1747.86 ; -1917,-1708.71 cw(c-1875.79,-1708.71) -1904.93,-1679.57 ccw(c-1875.79,-1708.71) -1917,-1708.71
VCC_AD: P4.1 R9.1 | length 386.6
  Top Layer w10: P4.1@-2264.79,-1929.12 ccw(c-2301.24,-1890.32) -2248,-1890.32 ; P4.1@-2257.95,-1936.41 ccw(c-2279.53,-1913.43) -2248,-1913.43 ccw(c-2216.47,-1913.43) P4.1@-2238.05,-1936.41 ; P4.1@-2248,-1947 -2248,-1890.31 ; P4.1@-2231.21,-1929.12 cw(c-2194.76,-1890.32) -2248,-1890.32 ; R9.1@-2148,-1863 -2220.69,-1863 ccw(c-2220.69,-1890.31) -2240,-1871 ccw(c-2220.69,-1890.31) -2248,-1890.31 ; -2174.64,-1863 cw(c-2174.64,-1887.14) -2157.57,-1870.07 ccw(c-2174.64,-1887.14) -2174.64,-1863 ; -2174.64,-1863 ccw(c-2174.64,-1838.86) -2157.57,-1855.93 cw(c-2174.64,-1838.86) -2174.64,-1863
VCC_ASIX: C9.2 C12.1 C13.2 P5.1 R6.2 R7.2 R8.2 U4.5 U5.9 U5.10 | length 2519.5
  Top Layer w10: P5.1@-2298.98,-641.93 cw(c-2319.8,-683.49) -2274.9,-671.46 cw(c-2232.38,-660.07) P5.1@-2268.1,-634.34 ; P5.1@-2294.51,-632.99 cw(c-2306.47,-656.88) -2280.66,-649.96 ; P5.1@-2288,-620 -2288,-622.58 ccw(c-2188,-622.58) -2258.71,-693.29 ; -2280.36,-651.1 cw(c-2254.46,-644.16) P5.1@-2276.21,-628.49 ; v1(-2241,-1102) C9.2@-2173,-1102 ; C12.1@-2238,-714 -2258.71,-693.29 ; v1(-2227,-781) C13.2@-2178,-781 ccw(c-2235.94,-781) -2194.97,-740.03 ; R6.2@-2225,-1049 R8.2@-2172,-1049 -2172,-1099.59 cw(c-2175.41,-1099.59) C9.2@-2173,-1102 ; C12.1@-2221,-714 -2194.97,-740.03 ; U4.5@-2199.24,-1193.63 -2179.18,-1193.63 ccw(c-2179.18,-1177.82) -2168,-1189 ccw(c-2189.73,-1167.27) -2159,-1167.27 -2159,-1135.8 ccw(c-2206.8,-1135.8) C9.2@-2173,-1102 ; C13.2@-2185.07,-790.57 cw(c-2216.32,-821.82) -2172.13,-821.82 ; C13.2@-2180.49,-793.19 cw(c-2191.61,-836.53) -2152.86,-814.15 ; U5.10@-2172.13,-840.58 C13.2@-2172.13,-781.13 ; C13.2@-2172.13,-797.68 ccw(c-2192.18,-797.68) -2178,-783.5 cw(c-2183.33,-804.28) C13.2@-2164.75,-793.56 ; C13.2@-2172,-781 cw(c-2219.22,-828.22) -2152.44,-828.22 U5.9@-2152.44,-840.58 ; v1(-2079,-1101) ccw(c-2112.8,-1067.2) -2065,-1067.2 ; R7.2@-2065,-1049 -2065,-1067.2 ; -2258.71,-693.29 ccw(c-2245.07,-679.65) -2235.71,-696.51 cw(c-2245.07,-679.65) -2258.71,-693.29 ; C12.1@-2249.33,-702.67 ccw(c-2238.38,-691.71) C12.1@-2230.85,-705.26 ; C12.1@-2249.33,-702.67 ccw(c-2238.38,-691.71) C12.1@-2230.85,-705.26 ; C12.1@-2249.33,-702.67 ccw(c-2238.38,-691.71) C12.1@-2230.85,-705.26 ; -2228.93,-1102 cw(c-2228.93,-1089.93) -2237.46,-1098.46 ccw(c-2228.93,-1089.93) -2228.93,-1102 ; -2228.93,-1102 ccw(c-2228.93,-1114.07) -2237.46,-1105.54 cw(c-2228.93,-1114.07) -2228.93,-1102 ; -2214.93,-781 cw(c-2214.93,-768.93) -2223.46,-777.46 ccw(c-2214.93,-768.93) -2214.93,-781 ; -2214.93,-781 ccw(c-2214.93,-793.07) -2223.46,-784.54 cw(c-2214.93,-793.07) -2214.93,-781 ; -2202.14,-781 cw(c-2202.14,-805.14) -2185.07,-788.07 ccw(c-2202.14,-805.14) -2202.14,-781 ; -2202.14,-781 ccw(c-2202.14,-756.86) -2185.07,-773.93 cw(c-2202.14,-756.86) -2202.14,-781 ; -2198.64,-1049 cw(c-2198.64,-1073.14) -2181.57,-1056.07 ccw(c-2198.64,-1073.14) -2198.64,-1049 ; -2198.64,-1049 ccw(c-2198.64,-1024.86) -2181.57,-1041.93 cw(c-2198.64,-1024.86) -2198.64,-1049 ; -2198.36,-1049 cw(c-2198.36,-1024.86) -2215.43,-1041.93 ccw(c-2198.36,-1024.86) -2198.36,-1049 ; -2198.36,-1049 ccw(c-2198.36,-1073.14) -2215.43,-1056.07 cw(c-2198.36,-1073.14) -2198.36,-1049 ; -2197.14,-1102 cw(c-2197.14,-1126.14) -2180.07,-1109.07 ccw(c-2197.14,-1126.14) -2197.14,-1102 ; -2197.14,-1102 ccw(c-2197.14,-1077.86) -2180.07,-1094.93 cw(c-2197.14,-1077.86) -2197.14,-1102 ; -2194.97,-740.03 cw(c-2184.16,-729.22) -2197.96,-722.62 ccw(c-2184.16,-729.22) -2194.97,-740.03 ; -2194.97,-740.03 ccw(c-2210.43,-755.48) -2213.34,-733.82 cw(c-2210.43,-755.48) -2194.97,-740.03 ; -2172,-1073.14 cw(c-2147.86,-1073.14) -2164.93,-1056.07 ccw(c-2147.86,-1073.14) -2172,-1073.14 ; -2172,-1073.14 ccw(c-2196.14,-1073.14) -2179.07,-1056.07 cw(c-2196.14,-1073.14) -2172,-1073.14 ; -2072.96,-1090.55 cw(c-2083.42,-1084.51) -2080.29,-1096.17 ccw(c-2083.42,-1084.51) -2072.96,-1090.55 ; -2072.96,-1090.55 ccw(c-2062.51,-1096.58) -2074.17,-1099.71 cw(c-2062.51,-1096.58) -2072.96,-1090.55 ; -2065,-1067.2 cw(c-2053.44,-1067.2) -2059.64,-1057.44 ccw(c-2053.44,-1067.2) -2065,-1067.2 ; -2065,-1067.2 ccw(c-2076.56,-1067.2) -2070.36,-1057.44 cw(c-2076.56,-1067.2) -2065,-1067.2 ; -2251.66,-700.34 cw(c-2265.31,-714) -2246,-714 ccw(c-2265.31,-714) -2251.66,-700.34 ; C13.2@-2186.66,-773.5 ccw(c-2205.65,-762.53) -2184.47,-756.86 cw(c-2205.65,-762.53) C13.2@-2186.66,-773.5 ; -2185.28,-753.84 ccw(c-2159.82,-747.02) -2173,-769.84 cw(c-2159.82,-747.02) -2185.28,-753.84 ; C9.2@-2180.07,-1092.43 ccw(c-2199.56,-1072.94) -2172,-1072.94 cw(c-2199.56,-1072.94) C9.2@-2180.07,-1092.43 ; C9.2@-2174.47,-1114.39 cw(c-2177.37,-1133.93) -2160.27,-1124.05 ccw(c-2177.37,-1133.93) C9.2@-2174.47,-1114.39 ; -2172,-1077.77 ccw(c-2151.27,-1077.77) -2165.93,-1092.43 cw(c-2151.27,-1077.77) -2172,-1077.77 ; C9.2@-2163.34,-1107.09 ccw(c-2144.14,-1112.23) -2161.36,-1122.17 cw(c-2144.14,-1112.23) C9.2@-2163.34,-1107.09
  Bottom Layer w10: v1@-2245.83,-1100.71 ccw(c-2257.49,-1097.58) -2247.04,-1091.55 ccw(c-2236.58,-1085.51) v1@-2239.71,-1097.17 ; v1@-2231.86,-782.17 cw(c-2243.6,-785) -2233.3,-791.3 cw(c-2223,-797.6) v1@-2225.83,-785.86 ; v1(-2227,-781) ccw(c-2161.82,-846.18) -2254,-846.18 -2254,-1070.62 ccw(c-2209.62,-1070.62) v1(-2241,-1102) cw(c-2238.59,-1104.41) -2238.59,-1101 v1(-2079,-1101) ; -2091.07,-1101 cw(c-2091.07,-1113.07) -2082.54,-1104.54 ccw(c-2091.07,-1113.07) -2091.07,-1101 ; -2091.07,-1101 ccw(c-2091.07,-1088.93) -2082.54,-1097.46 cw(c-2091.07,-1088.93) -2091.07,-1101 ; v1@-2237.46,-1105.54 cw(c-2226.51,-1116.49) -2226.51,-1101 ccw(c-2226.51,-1116.49) v1@-2237.46,-1105.54
VCC_GPS: C14.2 C15.1 P6.1 Q1.3 U6.22 U6.23 | length 1495.1
  Top Layer w15: Q1.3@-1732.44,-1932.51 ccw(c-1682.97,-1883.04) -1682.97,-1953 P6.1@-1577,-1953 ; Q1.3@-1728.81,-1942.38 cw(c-1722.86,-1964.58) -1711.37,-1944.67 ; Q1.3@-1721.59,-1929.87 ccw(c-1696.14,-1923.05) -1709.31,-1945.86 ; -1649.49,-1953 ccw(c-1649.49,-1872.51) P6.1@-1592.58,-1929.42 ; -1613.28,-1953 ccw(c-1613.28,-1908.72) P6.1@-1581.97,-1940.03 ; -1610.87,-1953 cw(c-1610.87,-1978.87) P6.1@-1592.58,-1960.58 ; P6.1@-1577,-1945 ccw(c-1577,-1923.27) P6.1@-1563.1,-1939.97 ; P6.1@-1568,-1938 -1566.71,-1939.29 ccw(c-1565,-1937.59) -1565,-1940 ccw(c-1565,-1882.06) P6.1@-1563.1,-1939.97 ; P6.1@-1561.64,-1938.64 cw(c-1577,-1923.27) P6.1@-1563.1,-1939.97 ; U6.23@-1336.63,-1533.99 cw(c-1350.72,-1548.07) -1330.8,-1548.07 cw(c-1310.88,-1548.07) U6.23@-1324.97,-1533.99 ; U6.23@-1330.8,-1500.6 -1330.8,-1612 ; U6.22@-1293.33,-1533.99 cw(c-1307.42,-1548.07) -1287.5,-1548.07 cw(c-1267.58,-1548.07) U6.22@-1281.67,-1533.99 ; U6.22@-1287.5,-1500.6 -1287.5,-1586.89 cw(c-1313.11,-1586.89) -1295,-1605 cw(c-1311.9,-1588.1) -1311.9,-1612 -1330.8,-1612 ; P6.1@-1563.1,-1939.97 ccw(c-1565,-1882.06) -1524.03,-1923.03 -1498.89,-1897.89 -1457,-1856 -1457,-1802 -1399.46,-1802 ccw(c-1399.46,-1740.54) -1356,-1784 ccw(c-1416.84,-1723.16) -1330.8,-1723.16 -1330.8,-1612 ; -1533.29,-1930.92 cw(c-1544.38,-1894.36) -1565.07,-1926.48 ccw(c-1544.38,-1894.36) -1533.29,-1930.92 ; -1533.29,-1930.92 ccw(c-1522.95,-1964.99) -1556.34,-1952.64 cw(c-1522.95,-1964.99) -1533.29,-1930.92 ; -1457,-1833.39 cw(c-1475.11,-1833.39) -1462.3,-1846.2 ccw(c-1475.11,-1833.39) -1457,-1833.39 ; -1457,-1833.39 ccw(c-1438.89,-1833.39) -1451.7,-1846.2 cw(c-1438.89,-1833.39) -1457,-1833.39 ; -1457,-1821.61 cw(c-1438.89,-1821.61) -1451.7,-1808.8 ccw(c-1438.89,-1821.61) -1457,-1821.61 ; -1457,-1821.61 ccw(c-1475.11,-1821.61) -1462.3,-1808.8 cw(c-1475.11,-1821.61) -1457,-1821.61 ; C15.1@-1470.66,-1869.66 cw(c-1457,-1883.31) -1457,-1864 ccw(c-1457,-1883.31) C15.1@-1470.66,-1869.66 ; C15.1@-1469.45,-1868.45 ccw(c-1481.4,-1856.5) -1464.5,-1856.5 cw(c-1481.4,-1856.5) C15.1@-1469.45,-1868.45 ; C14.2@-1451.7,-1806.3 cw(c-1441.31,-1816.69) -1441.31,-1802 ccw(c-1441.31,-1816.69) C14.2@-1451.7,-1806.3 ; C14.2@-1451.7,-1795.7 ccw(c-1436.48,-1780.48) -1436.48,-1802 cw(c-1436.48,-1780.48) C14.2@-1451.7,-1795.7
VCC_HALL: C17.2 P7.1 R13.1 U8.1 | length 537.3
  Top Layer w15: -2478.39,-1807.97 ccw(c-2502.28,-1794.18) U8.1@-2475.64,-1787.05 ; -2476.34,-1804.41 cw(c-2457.5,-1815.28) U8.1@-2463.13,-1794.27 ; P7.1@-2475.31,-1946.69 cw(c-2449.49,-1920.88) -2486,-1920.88 C17.2@-2486,-1861 -2486,-1835.61 cw(c-2413.58,-1835.61) U8.1@-2464.79,-1784.4 cw(c-2449.33,-1799.86) -2449.33,-1778 R13.1@-2399,-1778 ; U8.1@-2455.2,-1778.89 ccw(c-2446.08,-1773.05) -2440.66,-1782.43 ; -2486,-1881.61 cw(c-2467.89,-1881.61) -2480.7,-1868.8 ccw(c-2467.89,-1881.61) -2486,-1881.61 ; -2486,-1881.61 ccw(c-2504.11,-1881.61) -2491.3,-1868.8 cw(c-2504.11,-1881.61) -2486,-1881.61 ; -2486,-1840.39 cw(c-2504.11,-1840.39) -2491.3,-1853.2 ccw(c-2504.11,-1840.39) -2486,-1840.39 ; -2486,-1840.39 ccw(c-2467.89,-1840.39) -2480.7,-1853.2 cw(c-2467.89,-1840.39) -2486,-1840.39 ; -2419.61,-1778 cw(c-2419.61,-1796.11) -2406.8,-1783.3 ccw(c-2419.61,-1796.11) -2419.61,-1778 ; -2419.61,-1778 ccw(c-2419.61,-1759.89) -2406.8,-1772.7 cw(c-2419.61,-1759.89) -2419.61,-1778 ; U8.1@-2456.58,-1791.63 cw(c-2423.68,-1824.52) -2423.68,-1778 ccw(c-2423.68,-1824.52) U8.1@-2456.58,-1791.63
VUSB: C2.1 C3.1 J1.1 U1.3 U2.7 U2.8 | length 1344.1
  Top Layer w10: v1(-2577,-1240) -2576.2,-1240.8 v1@-2575.89,-1240.8 ; v1(-2516,-1388) ccw(c-2505.28,-1377.28) -2505.28,-1392.44 ; v1@-2512.41,-1391.48 cw(c-2506.67,-1397.04) -2502.67,-1390.12 ; U2.7@-2483.44,-1354.06 -2483.44,-1391.09 cw(c-2485.35,-1391.09) -2484,-1392.44 ; U2.8@-2445.06,-1392.44 -2484,-1392.44 ; -2505.28,-1392.44 cw(c-2505.28,-1386.63) -2511.04,-1387.37 ccw(c-2505.28,-1386.63) -2505.28,-1392.44 ; -2505.28,-1392.44 -2484,-1392.44 ; v1@-2512.46,-1384.46 ccw(c-2493.21,-1365.21) -2493.21,-1392.44 cw(c-2493.21,-1365.21) v1@-2512.46,-1384.46
  Top Layer w15: C2.1@-2768.31,-1070.69 ccw(c-2741.5,-1043.89) -2741.5,-1081.8 ; -2729.21,-1077 cw(c-2735.57,-1100.72) C3.1@-2714.3,-1088.44 ; J1.1@-2620.31,-1267.69 ccw(c-2620.31,-1222.75) -2588.53,-1254.53 -2582,-1248 ccw(c-2623.04,-1206.96) -2575.89,-1240.8 ccw(c-2623.04,-1206.96) -2565,-1206.96 -2565,-1128.79 ccw(c-2610.35,-1128.79) -2578.28,-1096.72 ccw(c-2614.31,-1132.74) U1.3@-2614.31,-1081.8 -2741.5,-1081.8 ; J1.1@-2606.12,-1268.19 cw(c-2593.85,-1275.27) -2597.51,-1261.59 ; U1.3@-2597.13,-1095.51 cw(c-2610.02,-1146.03) -2564.86,-1119.96 ; -2741.5,-1081.8 cw(c-2741.5,-1072.28) -2750.95,-1073.48 ccw(c-2741.5,-1072.28) -2741.5,-1081.8 ; -2741.5,-1081.8 ccw(c-2741.5,-1101.51) -2755.7,-1087.83 cw(c-2741.5,-1101.51) -2741.5,-1081.8 ; -2669.15,-1081.8 cw(c-2669.15,-1115.96) -2644.98,-1091.8 ccw(c-2669.15,-1115.96) -2669.15,-1081.8 ; -2669.15,-1081.8 ccw(c-2669.15,-1047.63) -2644.98,-1071.79 cw(c-2669.15,-1047.63) -2669.15,-1081.8 ; C2.1@-2755.93,-1088.07 cw(c-2740.79,-1103.21) -2740.79,-1081.8 ccw(c-2740.79,-1103.21) C2.1@-2755.93,-1088.07 ; C2.1@-2755.93,-1063.32 ccw(c-2711.33,-1018.71) -2711.33,-1081.8 cw(c-2711.33,-1018.71) C2.1@-2755.93,-1063.32 ; -2732.91,-1081.8 cw(c-2732.91,-1109.79) -2713.11,-1090 ccw(c-2732.91,-1109.79) -2732.91,-1081.8 ; C3.1@-2697.5,-1090 cw(c-2677.71,-1109.79) -2677.71,-1081.8 ccw(c-2677.71,-1109.79) C3.1@-2697.5,-1090 ; -2583.39,-1249.39 ccw(c-2592.78,-1240) -2579.5,-1240 cw(c-2592.78,-1240) -2583.39,-1249.39
  Bottom Layer w10: v1(-2577,-1240) ccw(c-2555.27,-1261.73) -2586,-1261.73 -2586,-1345.79 ccw(c-2534.79,-1345.79) -2571,-1382 ccw(c-2556.51,-1367.51) -2556.51,-1388 v1(-2516,-1388) ; -2583.04,-1250.45 cw(c-2572.58,-1256.49) -2575.71,-1244.83 ccw(c-2572.58,-1256.49) -2583.04,-1250.45 ; -2583.04,-1250.45 ccw(c-2593.49,-1244.42) -2581.83,-1241.29 cw(c-2593.49,-1244.42) -2583.04,-1250.45 ; -2528.07,-1388 cw(c-2528.07,-1400.07) -2519.54,-1391.54 ccw(c-2528.07,-1400.07) -2528.07,-1388 ; -2528.07,-1388 ccw(c-2528.07,-1375.93) -2519.54,-1384.46 cw(c-2528.07,-1375.93) -2528.07,-1388
WK_UP1: M1.8 P2.13 | length 1086.1
  Top Layer w15: P2.13@-1668,-1118 -1657.29,-1107.29 cw(c-1586.58,-1178) -1586.58,-1078 -1187.42,-1078 cw(c-1187.42,-1178) -1116.71,-1107.29 cw(c-1163.17,-1153.75) -1097.46,-1153.75 M1.8@-1097.46,-1333.78 ; P2.13@-1665.7,-1111.36 ccw(c-1656.58,-1085.02) -1632.44,-1098.95 ; -1097.46,-1287.46 cw(c-1122.13,-1287.46) -1104.69,-1304.9 ccw(c-1122.13,-1287.46) -1097.46,-1287.46 ; -1097.46,-1287.46 ccw(c-1072.8,-1287.46) -1090.24,-1304.9 cw(c-1072.8,-1287.46) -1097.46,-1287.46 ; P2.13@-1662.3,-1096.72 ccw(c-1652,-1058.29) -1632.1,-1092.75 cw(c-1652,-1058.29) P2.13@-1662.3,-1096.72 ; P2.13@-1646.72,-1123.7 cw(c-1582.43,-1140.93) -1615.71,-1083.28 ccw(c-1582.43,-1140.93) P2.13@-1646.72,-1123.7
WK_UP2: P2.14 P12.2 | length 927.1
  Top Layer w10: P12.2@-1979,-620 -1979,-598.97 cw(c-1938.03,-598.97) -1967,-570 cw(c-1945.27,-591.73) -1945.27,-561 -1855.07,-561 cw(c-1855.07,-578.07) -1843,-566 cw(c-1864.73,-587.73) -1834,-587.73 -1834,-1010.58 ccw(c-1734,-1010.58) -1804.71,-1081.29 ; P2.14@-1792.41,-1115.62 ccw(c-1834.89,-1111.47) -1804.71,-1081.29 ; P2.14@-1782.46,-1116.59 ccw(c-1807.62,-1114.13) -1789.74,-1096.26 ccw(c-1771.87,-1078.38) P2.14@-1769.41,-1103.54 ; P2.14@-1770.38,-1093.59 cw(c-1774.53,-1051.11) -1804.71,-1081.29 ; P2.14@-1768,-1118 -1804.71,-1081.29 ; -1975.95,-587.59 cw(c-1987.54,-584.49) -1984.74,-596.15 ccw(c-1987.54,-584.49) -1975.95,-587.59 ; -1975.95,-587.59 ccw(c-1968.57,-589.57) -1971.05,-596.8 cw(c-1968.57,-589.57) -1975.95,-587.59
pads on no net: J1.4 JTAG.1 JTAG.3 JTAG.5 JTAG.6 M1.10 U2.1 U2.2 U2.10 U2.12 U2.13 U2.14 U2.15 U2.16 U2.17 U2.18 U2.19 U2.20 U2.21 U2.22 U2.23 U2.24 U2.27 U2.28 U4.3 U4.4 U6.1 U6.2 U6.4 U6.5 U6.6 U6.15 U6.16 U6.17 U6.18 U6.19 U7.4 U7.5
copper on no net:
  other v3: -2696.31,-1928.69 -533,-1929 -2695.31,-614.69 -533,-614

## Polygon pours and split planes (outlines as drawn)
GND on Bottom Layer "Top Layer-No Net" (solid, remove dead copper, pour order 6): -2932,-437 -371,-437 -352,-418 -356,-422 -356,-2132 -2882,-2132 -2905,-2109
no net on Bottom Layer "Bottom Layer-No Net" (solid, pour order 2): -2918,-342
GND on Top Layer "Top Layer-No Net" (solid, remove dead copper, pour order 8): -2953,-373 -2903,-423 -326,-423 -326,-2050 -316,-2060 -383,-2127 -3010,-2127

## Keep-outs
Keep-Out Layer:
  lines w3.94: -2791.84,-2059 -440,-2059 ccw(c-437.71,-2024.54) -403.17,-2024.54 ; -2791.84,-2058.83 cw(c-2791.84,-2024.29) -2826.31,-2022 -2826.31,-518.46 cw(c-2791.77,-518.46) -2789.48,-484 -437.46,-484 ; -437.46,-484.17 cw(c-437.46,-518.71) -403,-521 -403,-2024.54

## Silkscreen, mask and mechanical layers (free items; w line width, h text height)
Top Overlay:
  rectangle: -1497,-1295 -800,-885
  rectangle: -1414,-1912 -799,-1551
  text "3ASIX" at -2331,-560 h45
  text "LED KEY" at -2122,-560 h45
  text "VCC" at -2515,-561 h45
  text "PC4" at -1611,-635 h35
  text "PC3" at -1611,-736 h35
  text "LoRa" at -581,-834 h45
  text "PC2" at -1611,-838 h35
  text "PWR" at -2796,-885 h45
  text "PC1" at -1611,-937 h35
  text "PB1" at -1611,-1036 h35
  text "PC5" at -1611,-1136 h35
  text "PC6" at -1611,-1237 h35
  text "PD5" at -1611,-1338 h35
  text "PD6" at -1611,-1437 h35
  text "GPS" at -590,-1481 h45
  text "OMx02O EVK" at -2380,-1516 h60
  text "PD7" at -1611,-1536 h35
  text "ManThink" at -2379,-1605 h60
  text "PD4" at -1611,-1638 h35
  text "USB" at -2790,-1670 h45
  text "PC7" at -1612,-1734 h35
  text "GPS" at -1593,-2049 h45
  text "ADIN" at -2274,-2050 h45
  text "18B20" at -2054,-2050 h45
  text "HALL" at -2513,-2051 h45
Bottom Overlay:
  text "EV306V1.1" at -1389,-1786 h50
  text "www.manthink.cn" at -1387,-1849 h50

## Text inside footprints (layer, text, board x,y; h text height)
SW2: Mechanical 7 "1" at -1943.35,-988.92 h25 r270